# Altium PCB biolab_rev2.PcbDoc
Units mil, origin at the board's own origin, x right, y up, seen from the top; angles counter-clockwise.
Board outline 6014.04 x 5588.39 mil, 2 copper layers (Top Layer, Bottom Layer); 9 components, 2 nets, 76 pads, 0 vias.
Unrouted connection lines stored in the file: 2.
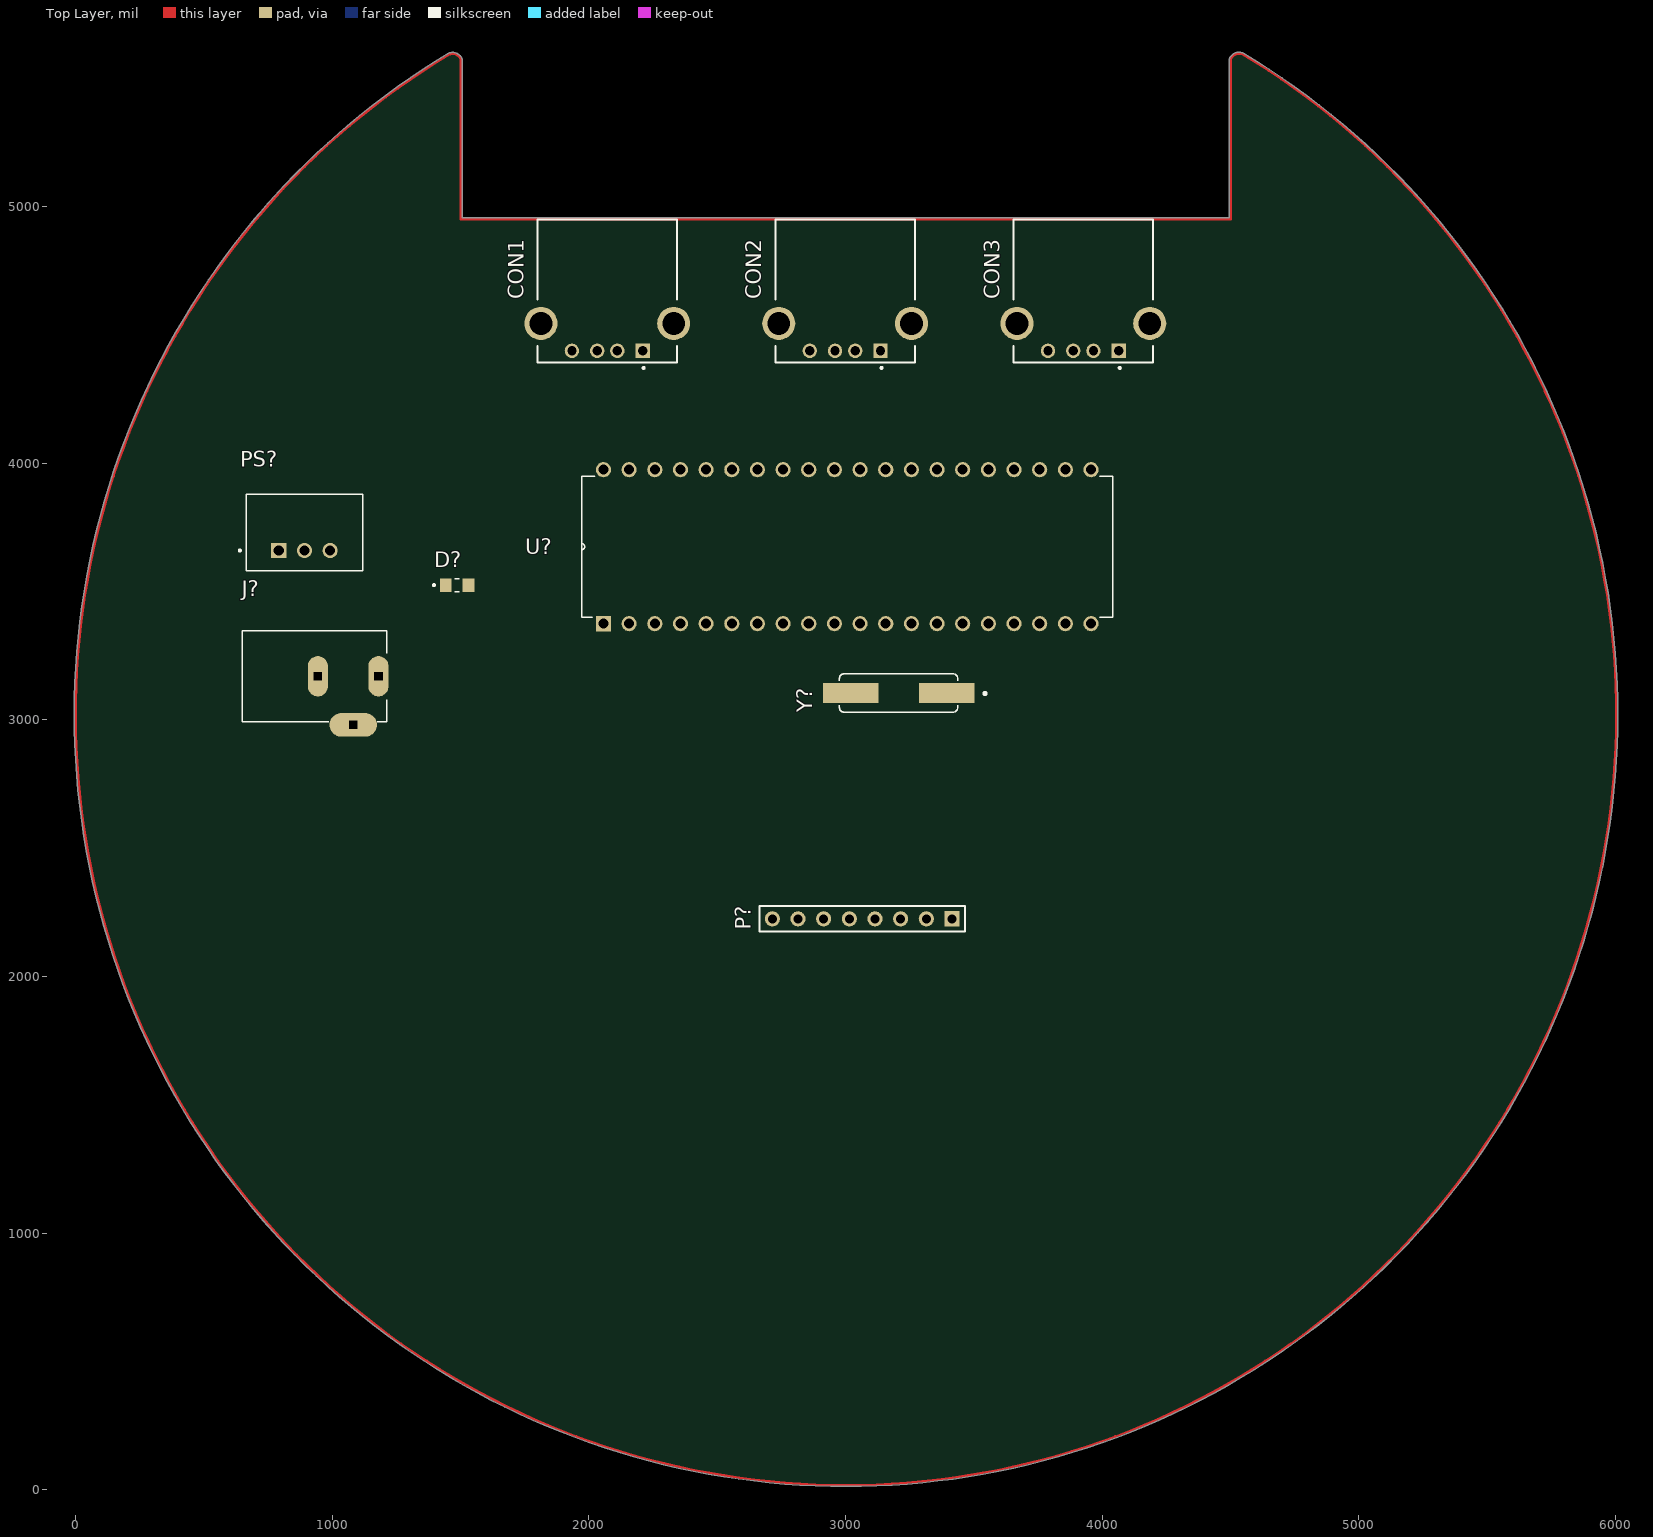
[diagram p0: Top Layer view]
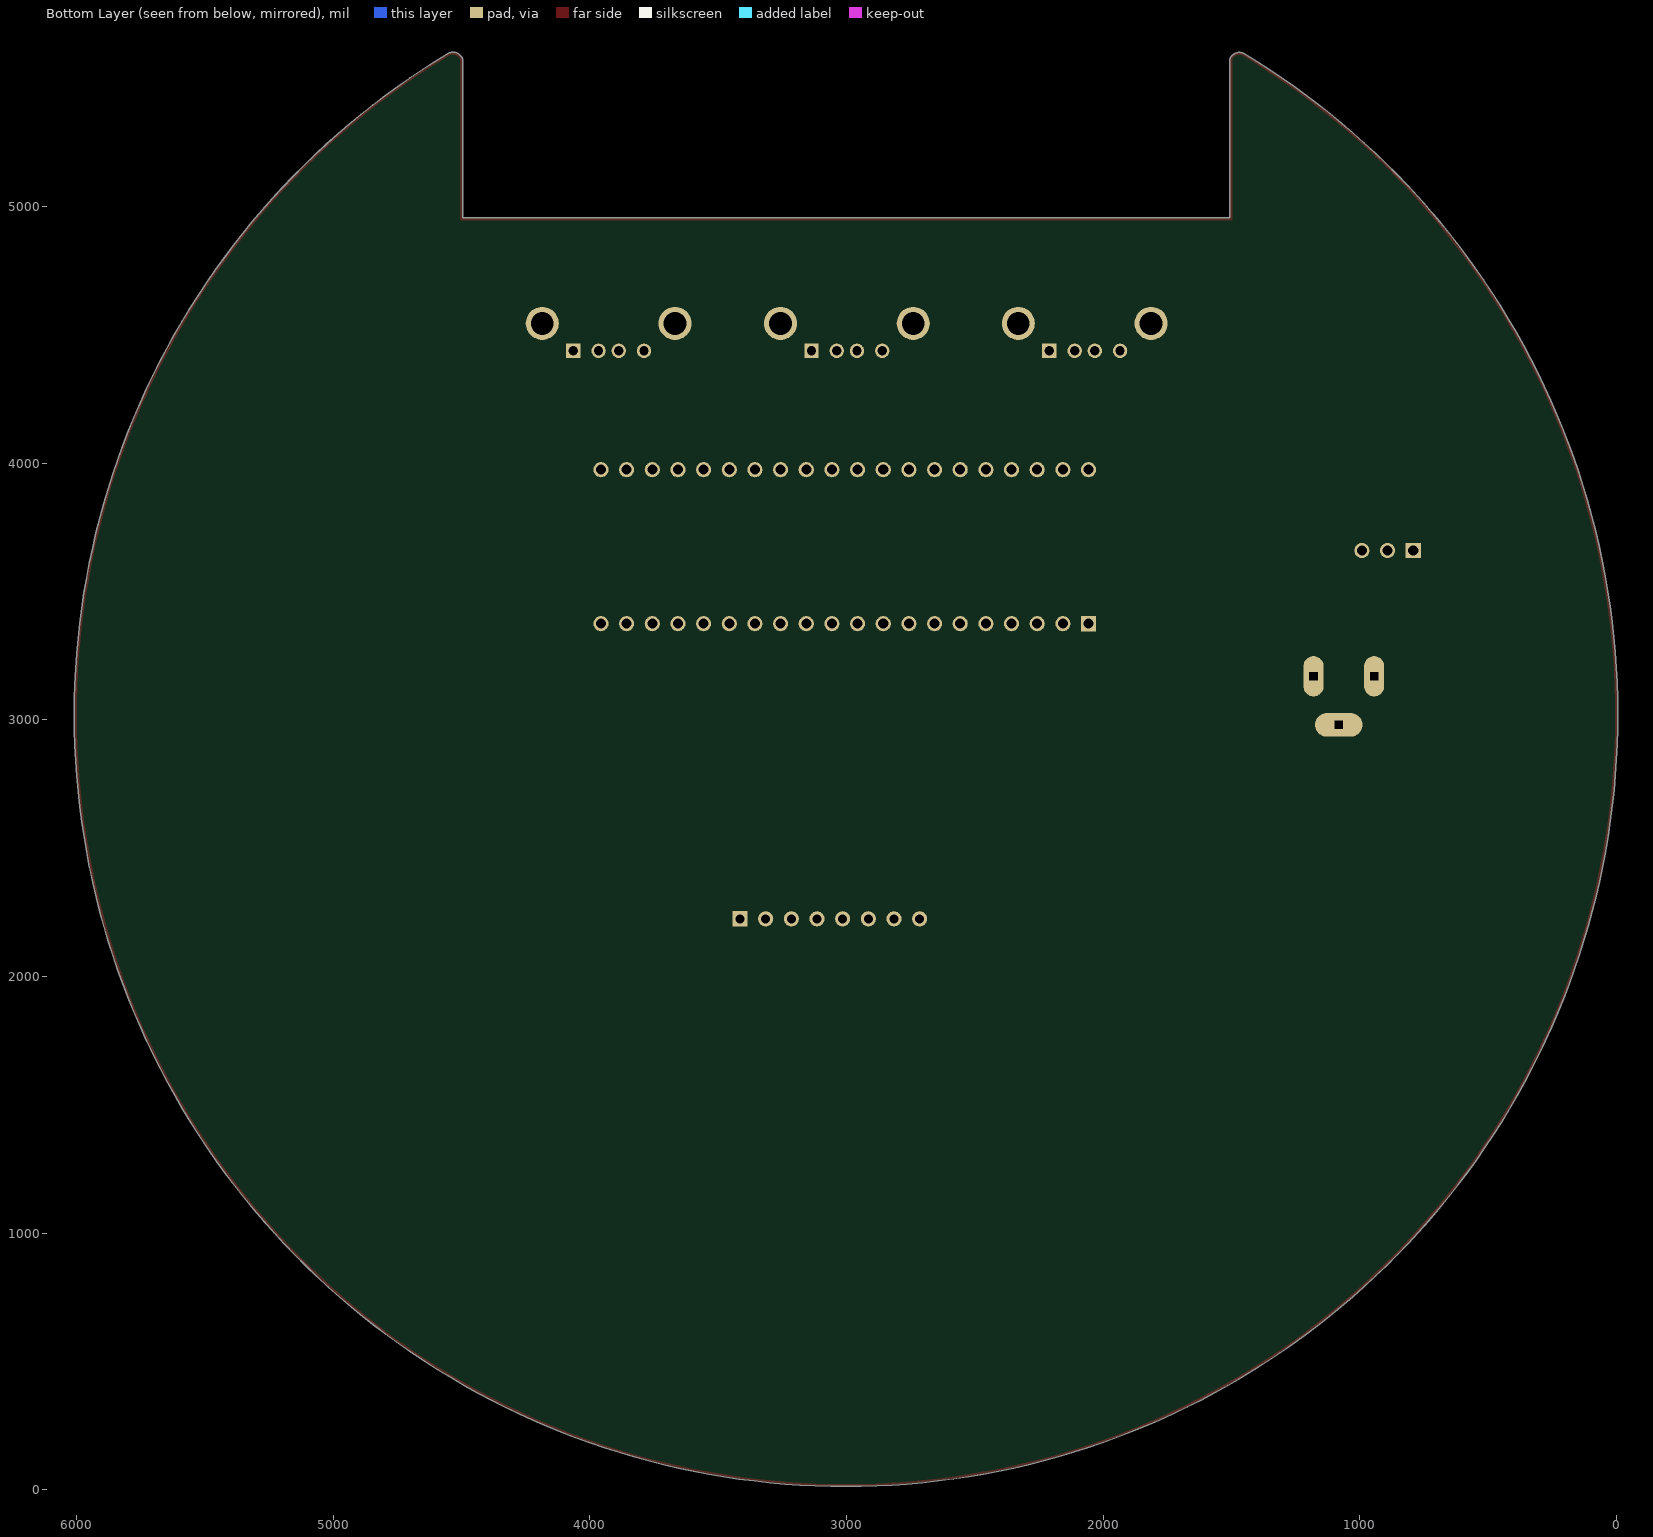
[diagram p1: Bottom Layer view, seen from below]

## Layer stack, top to bottom
Top Solder: solder mask 0.4, Solder Resist, Dk 3.5
Top Layer: signal copper 1.4
Dielectric 1: dielectric 12.6, FR-4, Dk 4.8
Bottom Layer: signal copper 1.4
Bottom Solder: solder mask 0.4, Solder Resist, Dk 3.5

## Board outline
698.46,4952.79 cw(c3001.87,3020) 1453.21,5597.41 1453.82,5597.72 cw(c1469.31,5561.48) 1505.55,5576.97 1505.95,5575 1505.95,4955.95 4495.92,4955.95 4495.92,5575 4496.34,5577 cw(c4533.81,5560.72) 4550.09,5598.2 4550.67,5597.9 cw(c3001.87,3020.26) 6009.03,3020.26 cw(c3001.87,3020.26) 3001.87,13.11 3001.84,13.11 cw(c3001.87,3020)

## Design rules (kind name [scope] priority, off if disabled: settings)
Clearance [All] p1: gap=10 ignorepadtopadclearanceinfootprint=FALSE except(0: Arc-Hole Track-Hole SMDPad-Hole THPad-Hole Via-Hole Fill-Hole Poly-Hole Region-Hole Text-Hole)
PolygonConnect [All] p1: connectstyle=Relief reliefconductorwidth=10 reliefentries=4 polygonreliefangle="90 Angle" airgapwidth=10
RoomDefinition biolab_rev2 [InComponentClass('biolab_rev2')] p1: confinementstyle=ConfineIn formatcopy=TRUE lockcomponents=FALSE outline 6056.87,-30 6191.87,-30 6191.87,890 6056.87,890
RoutingVias [All] p1: holewidth=28 width=50 viastyle="Through Hole" minholewidth=28 minwidth=50 maxholewidth=28 maxwidth=50
SolderMaskExpansion [All] p1: expansion=4 istentingtop=FALSE
Width [All] p1: maxlimit=10 minlimit=10 preferedwidth=10
30 further rules are at their usual default settings.

## Components (designator, comment, footprint, x,y, rotation, side; value= is the part's Value field where it differs from the comment)
CON1 "USB1130-15-A_REVA" GCT_USB1130-15-A_REVA 2071.87,4545 r180 top
CON2 "USB1130-15-A_REVA" GCT_USB1130-15-A_REVA 2998.63,4545 r180 top
CON3 "USB1130-15-A_REVA" GCT_USB1130-15-A_REVA 3926.87,4545 r180 top
D? "7012X1" LED_7012X1 1486.87,3525 r0 top
J? "DC-005" NINIGI_DC-005 1081.87,3170 r0 top
P? "Header 8" HDR1X8 3415,2225 r180 top
PS? "R-785.0-0.5" CONV_R-785.0-0.5 891.87,3729.88 r0 top
U? "ATMEGA644PV-10PU" DIP254P1524X483-40 3956.87,3975 r90 top
Y? "FOXSDLF/160-20" XTAL_FOXSDLF/160-20 3206.87,3105 r180 top

## Footprints (in the part's own frame and the unit in brackets; to place one, negate y for a bottom-side part, rotate by r counter-clockwise, add the part's x,y. Pads: shape width x height; smd on the part's side, far side on the other; paste and mask are expansions set on the pad)
CONV_R-785.0-0.5 [mm]
  rect 1.508x1.508 hole 1: 1(-2.54,-1.775)
  round 1.508 hole 1: 2(0,-1.775) 3(2.54,-1.775)
  silkscreen extent -6.5,-3.77 5.75,3.77, body extent -5.62,-3.93 5.88,3.67, height 10.16
DIP254P1524X483-40 [mil]
  rect 59x59 hole 39: 1(-600,1900)
  round 59 hole 39: 2(-600,1800) 3(-600,1700) 4(-600,1600) 5(-600,1500) 6(-600,1400) 7(-600,1300) 8(-600,1200) 9(-600,1100) 10(-600,1000) 11(-600,900) 12(-600,800) 13(-600,700) 14(-600,600) 15(-600,500) 16(-600,400) 17(-600,300) 18(-600,200) 19(-600,100) 20(-600,0) 21(0,0) 22(0,100) 23(0,200) 24(0,300) 25(0,400) 26(0,500) 27(0,600) 28(0,700) 29(0,800) 30(0,900) 31(0,1000) 32(0,1100) 33(0,1200) 34(0,1300) 35(0,1400) 36(0,1500) 37(0,1600) 38(0,1700) 39(0,1800) 40(0,1900)
  silkscreen extent -575,-85 -25,1985, body extent -625,-80 25,1980, height 190
GCT_USB1130-15-A_REVA [mm]
  rect 1.428x1.428 hole 0.92: 1(-3.5,2.71)
  round 1.428 hole 0.92: 2(-1,2.71) 3(1,2.71) 4(3.5,2.71)
  round 3.276 hole 2.26: S1(-6.57,0) S2(6.57,0)
  silkscreen extent -6.9,-10.28 6.9,4.5, body extent -7.8,-10.28 7.8,3.88, height 6.99
HDR1X8 [mm] "Connector; Header; 8 Position"
  rect 1.5x1.5 hole 0.9: 1(0,0)
  round 1.5 hole 0.9: 2(2.54,0) 3(5.08,0) 4(7.62,0) 5(10.16,0) 6(12.7,0) 7(15.24,0) 8(17.78,0)
  silkscreen extent -1.27,-1.27 19.05,1.27
LED_7012X1 [mm]
  rect 1.15x1.3 smd: A(1.125,0) C(-1.125,0)
  silkscreen extent -2.4,-0.63 0.23,0.63, body extent -0.62,-1 0.62,1, height 0.73
NINIGI_DC-005 [mm]
  oval 4.7x2.35 hole 0.8 square: 2(0,-4.8)
  oval 2x4 hole 0.8 square: 3(-3.5,0) 4(2.5,0)
  silkscreen extent -11,-4.5 3.3,4.5, body extent -11.25,-5.34 3.05,4.07, height 11
XTAL_FOXSDLF/160-20 [mm]
  rect 5.5x2 smd: 1(-4.75,0) 2(4.75,0)
  silkscreen extent -8.6,-1.9 5.85,1.9

## Part data
CON1 CON2 CON3: Package=None, Availability=Unavailable, MF="{'manufacturer': u'Global Connector Technology'}", MP=USB1130-15-A_REVA, Price=None
D?: "Red LED Indication - Discrete 1.7V 0805 (2012 Metric)", Package=None, Availability=Unavailable, MF="{'manufacturer': u'Visual'}", MP=7012X1, Price=None
J?: "DC Jack", Package=None, Availability=Unavailable, MF="{'manufacturer': u'Best Inc.'}", MP=DC-005, Price=None
P?: "Header, 8-Pin", LatestRevisionDate=17-Jul-2002, LatestRevisionNote="Re-released for DXP Platform.", Publisher="Altium Limited"
PS?: "0.5 Amp SIP3 Single Output", Package=None, Availability=Unavailable, MF="{'manufacturer': u'Recom Power'}", MP=R-785.0-0.5, Price=None
U?: "8-bit Microcontroller with In-System Programmable  Flash", Package=None, Availability=Unavailable, MF="{'manufacturer': u'Microchip Technology'}", MP=ATMEGA644PV-10PU, Price=None
Y?: "Crystal 16MHz 20pF 2-Pin HC-49/SD", Package=None, Availability=Unavailable, MF="{'manufacturer': u'Fox Electronics'}", MP=FOXSDLF/160-20, Price=None

## Nets (pads, with @x,y where several pads share a name; then routed paths per layer and width w, separated by ;. In a path a pad name is that pad's centre, name@x,y a point inside that pad or via, vN(x,y) a via of type N, cw(c..) or ccw(c..) an arc to the next point about the centre after c; other vN are vias at no path point)
NetU?_12: U?.12 Y?.2
NetU?_13: U?.13 Y?.1
pads on no net: CON1.1 CON1.2 CON1.3 CON1.4 CON1.S1 CON1.S2 CON2.1 CON2.2 CON2.3 CON2.4 CON2.S1 CON2.S2 CON3.1 CON3.2 CON3.3 CON3.4 CON3.S1 CON3.S2 D?.A D?.C J?.2 J?.3 J?.4 P?.1 P?.2 P?.3 P?.4 P?.5 P?.6 P?.7 P?.8 PS?.1 PS?.2 PS?.3 U?.1 U?.2 U?.3 U?.4 U?.5 U?.6 U?.7 U?.8 U?.9 U?.10 U?.11 U?.14 U?.15 U?.16 U?.17 U?.18 U?.19 U?.20 U?.21 U?.22 U?.23 U?.24 U?.25 U?.26 U?.27 U?.28 U?.29 U?.30 U?.31 U?.32 U?.33 U?.34 U?.35 U?.36 U?.37 U?.38 U?.39 U?.40
copper on no net: | length 19973.8
  Top Layer w10: 702.31,4949.57 702.74,4950 ; 5297.2,4955 5297.84,4954.36 5297.98,4954.36 ; 1455.79,5593.11 cw(c1469.31,5561.48) 1500.94,5575 1500.94,4950.94 4500.94,4950.94 4500.94,5575 cw(c4533.81,5560.72) 4548.09,5593.6 cw(c3001.87,3020.26) 3001.87,18.13 cw(c3001.87,3020) 1455.79,5593.11

## Text inside footprints (layer, text, board x,y; h text height)
CON1: Mechanical 13 "PCB EDGE" at 1778.57,4938.7 h32 r180
CON2: Mechanical 13 "PCB EDGE" at 2705.32,4938.7 h32 r180
CON3: Mechanical 13 "PCB EDGE" at 3633.57,4938.7 h32 r180